# Altium PCB Underwater_vehicle.PcbDoc
Units mil, origin at the board's own origin, x right, y up, seen from the top; angles counter-clockwise.
Board outline 2755.91 x 1968.5 mil, 2 copper layers (Top Layer, Bottom Layer); 64 components, 132 nets, 425 pads, 45 vias.
Unrouted connection lines stored in the file: 127.
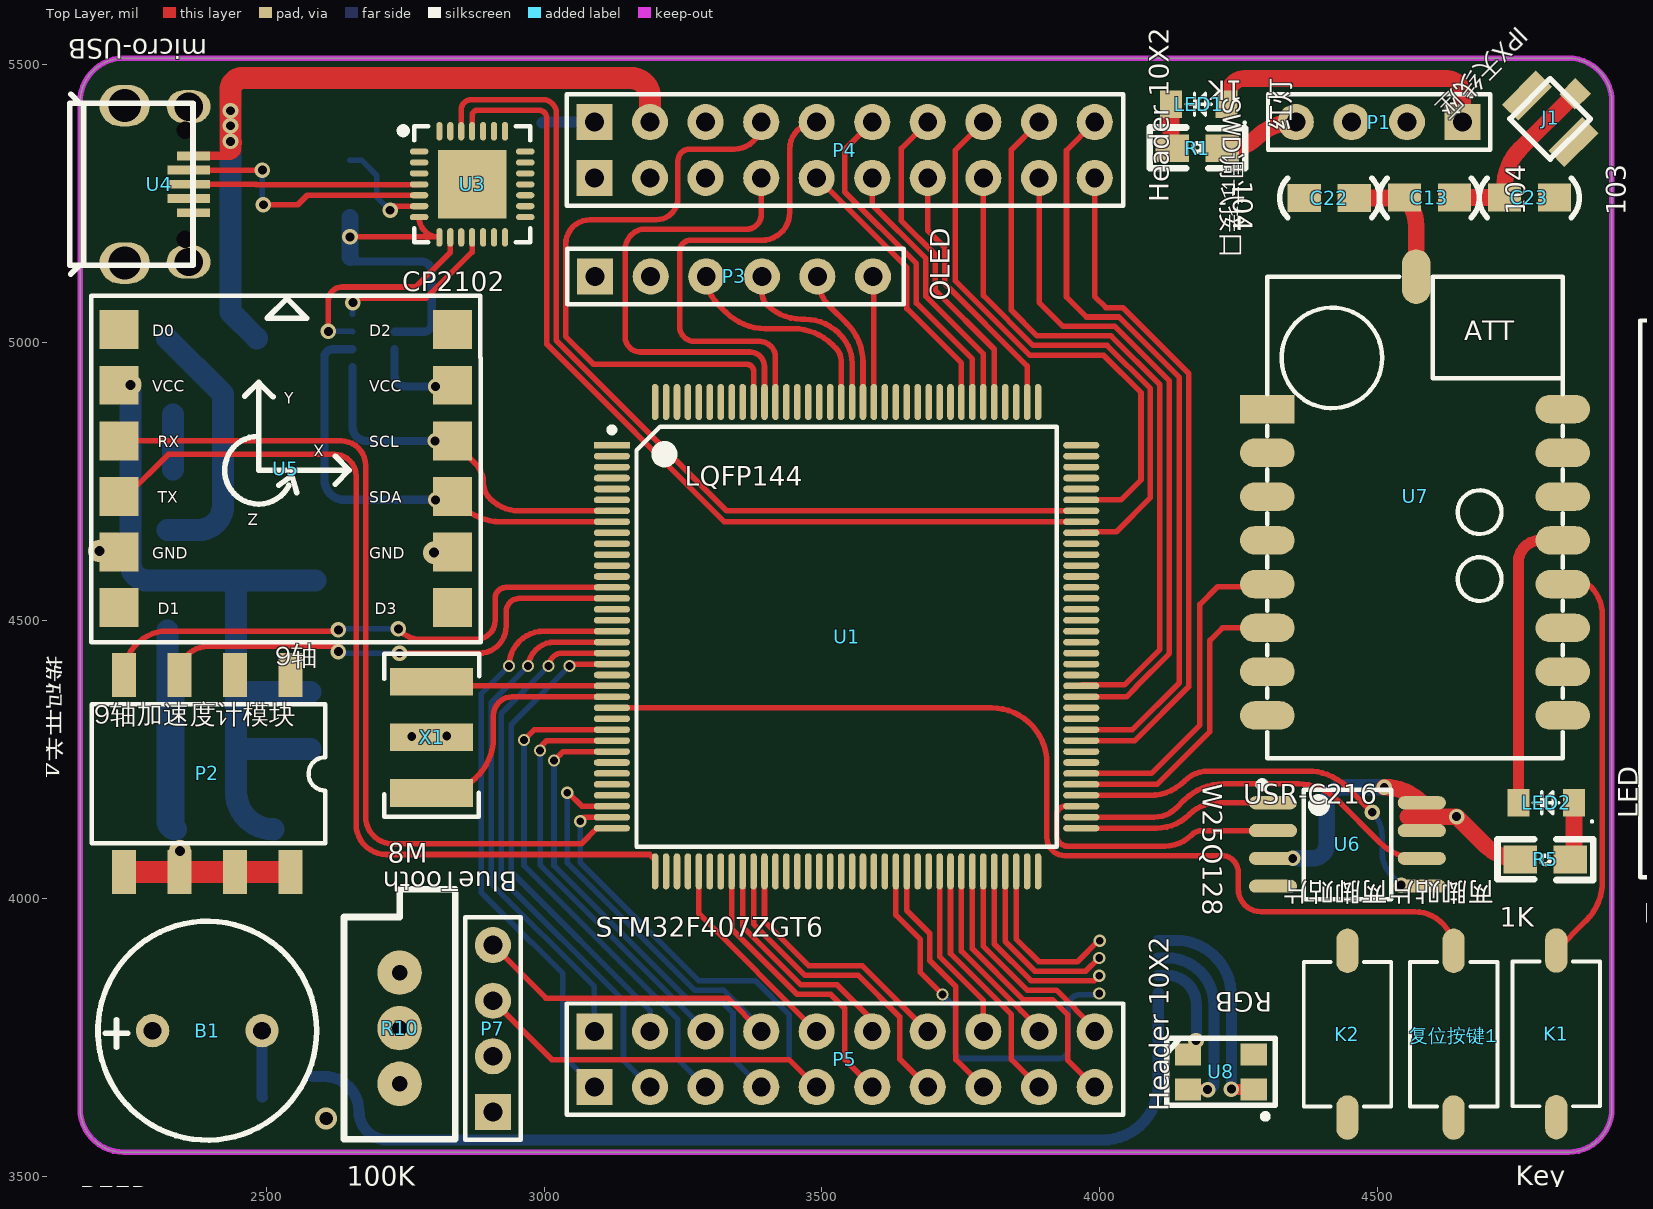
[diagram p0: Top Layer view]
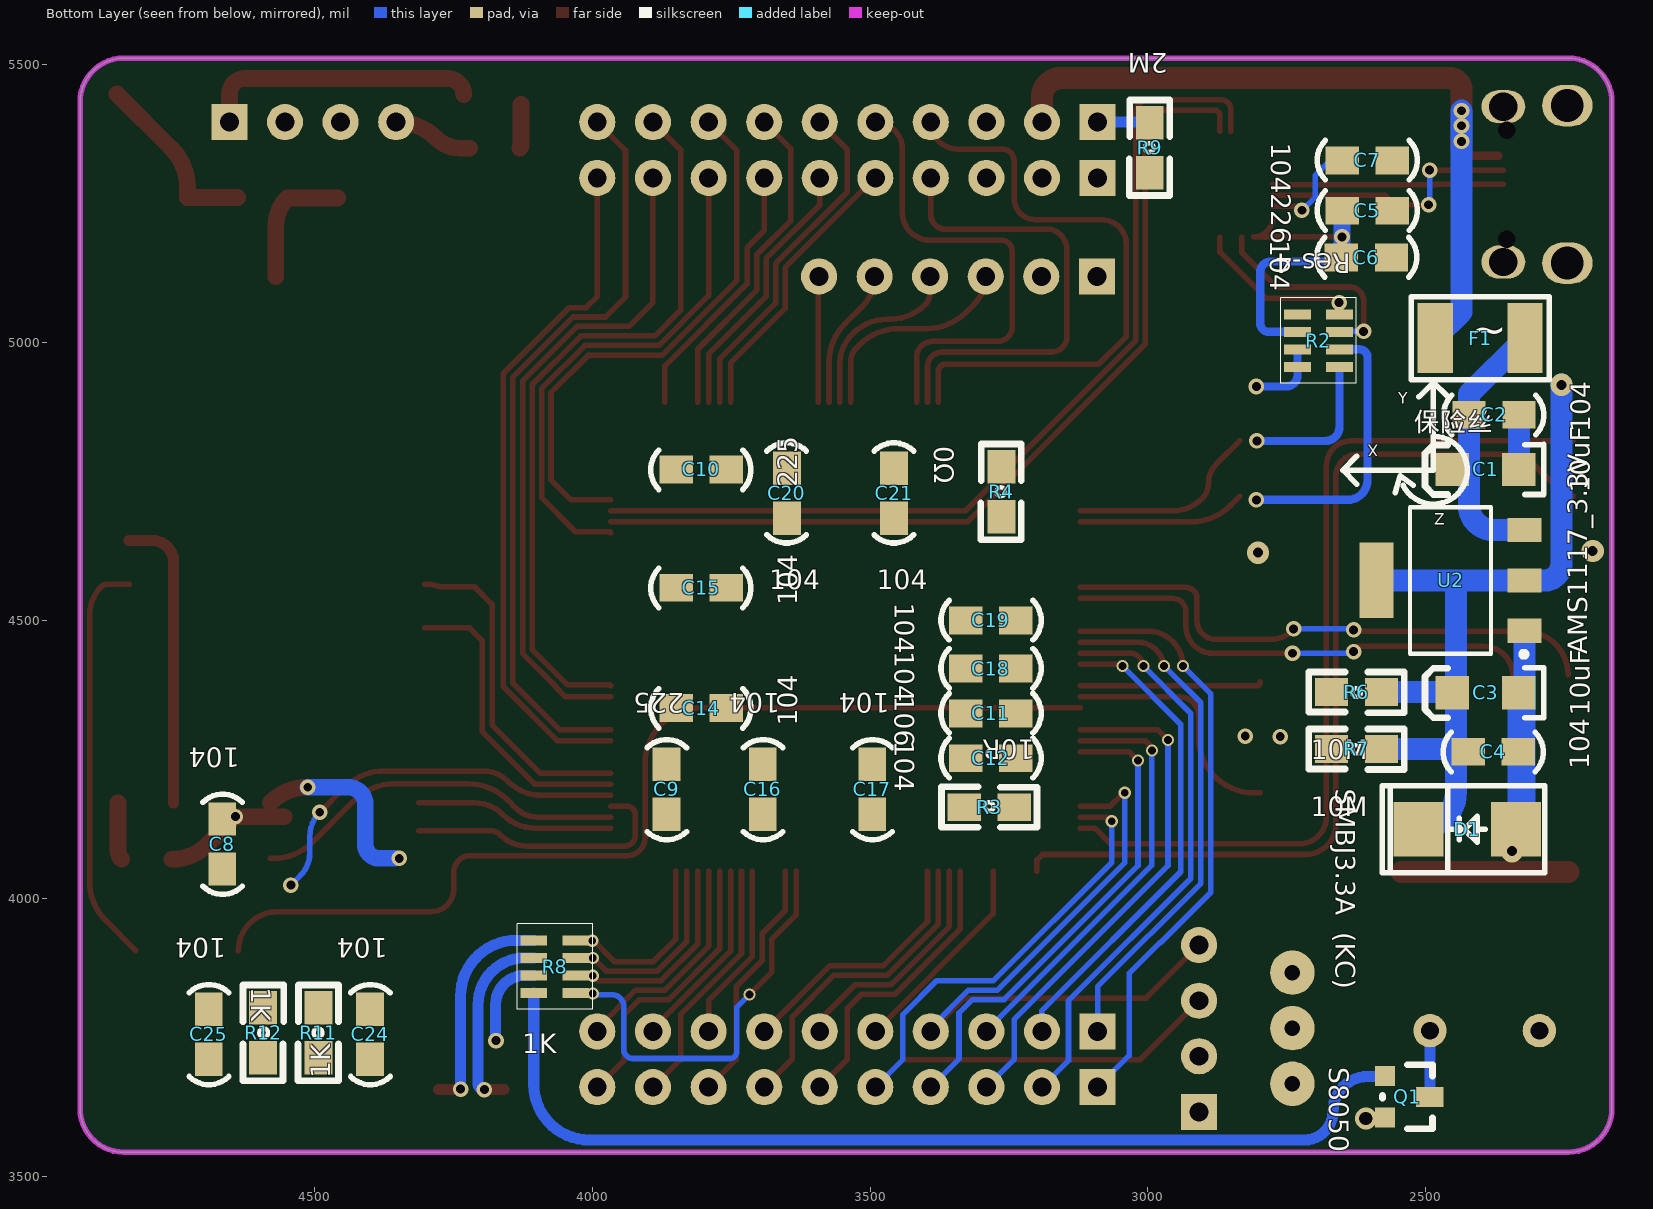
[diagram p1: Bottom Layer view, seen from below]

## Layer stack, top to bottom
Top Solder: solder mask 0.4, Solder Resist, Dk 3.5
Top Layer: signal copper 1.4
Dielectric 1: dielectric 12.6, FR-4, Dk 4.8
Bottom Layer: signal copper 1.4
Bottom Solder: solder mask 0.4, Solder Resist, Dk 3.5

## Board outline
2244.09,3543.31 cw(c2244.09,3622.05) 2165.35,3622.05 2165.35,5433.07 cw(c2244.09,5433.07) 2244.09,5511.81 4842.52,5511.81 cw(c4842.52,5433.07) 4921.26,5433.07 4921.26,3622.05 cw(c4842.52,3622.05) 4842.52,3543.31

## Design rules (kind name [scope] priority, off if disabled: settings)
Clearance Clearance_2 [All] p1: gap=7
ComponentClearance [All] p1: gap=0 collisioncheckmode=3 verticalgap=0 showdistances=FALSE
DiffPairsRouting [All] p1 off: maxlimit=10 minlimit=10 mostfreqgap=10 toplayer_minwidth=15 toplayer_maxwidth=15 toplayer_prefwidth=10 bottomlayer_minwidth=15 bottomlayer_maxwidth=15 bottomlayer_prefwidth=10 maxuncoupledlength=20
PolygonConnect [All] p1: connectstyle=Relief reliefconductorwidth=10 reliefentries=4 polygonreliefangle="90 Angle" airgapwidth=10
RoutingVias [All] p1: holewidth=28 width=50 viastyle="Through Hole" minholewidth=28 minwidth=50 maxholewidth=28 maxwidth=50
SolderMaskExpansion [All] p1: expansion=4
Width [All] p1: maxlimit=300 minlimit=10 preferedwidth=30
28 further rules are at their usual default settings.

## Components (designator, comment, footprint, x,y, rotation, side; value= is the part's Value field where it differs from the comment)
B1 "BEEP" BUZZER 2394.3,3762 r0 top
C1 "10uF" TAJ-A 2452.76,4771.65 r0 bottom
C2 "104" 0805C 2337.45,4870.08 r0 bottom
C3 "10uF" TAJ-A 2452.76,4370.08 r0 bottom
C4 "104" 0805C 2338.58,4263.78 r0 bottom
C5 "226" 0805C 2645.8,5237.22 r180 bottom
C6 "104" 0805C 2647,5153 r180 bottom
C7 "104" 0805C 2645.8,5327.77 r180 bottom
C8 "104" 0805C 4665.35,4137.8 r270 bottom
C9 "225" 0805C 3866.14,4236.22 r270 bottom
C10 "225" 0805C 3763.9,4771.65 r0 bottom
C11 "106" 0805C 3322.83,4332.68 r180 bottom
C12 "104" 0805C 3322.83,4251.97 r180 bottom
C13 "104" 0805C 4632.99,5260.84 r180 top
C14 "104" 0805C 3763.9,4342.52 r0 bottom
C15 "104" 0805C 3763.9,4559.06 r0 bottom
C16 "104" 0805C 3692.91,4236.22 r270 bottom
C17 "104" 0805C 3496.06,4236.22 r270 bottom
C18 "104" 0805C 3322.83,4413.39 r180 bottom
C19 "104" 0805C 3322.83,4500 r180 bottom
C20 "104" 0805C 3649.61,4688.98 r90 bottom
C21 "104" 0805C 3456.69,4688.98 r90 bottom
C22 "104" 0805C 4373,5260 r0 top
C23 "103" 0805C 4813,5261 r180 top
C24 "104" 0805C 4399.54,3795.46 r270 bottom
C25 "104" 0805C 4689.94,3795.46 r270 bottom
C26 "104" 0805C 5127,5161 r180 bottom
D1 "SMBJ3.3A  (KC)" SMBJ 2338.58,4125.98 r270 bottom
F1 "保险丝" 1812 2488.19,5007.87 r180 bottom
J1 "IPX天线座" IPX天线底座 4858.3,5448 r225 top
K1 "Key" 贴片按键 4824,3612 r90 top
K2 "两脚贴片" 贴片按键 4442.7,3900 r270 top
LED1 "红灯" 0805LED(RED) 4225,5424 r180 top
LED2 "LED" 0805LED(GREEN) 4851,4170 r180 top
P1 "SWD调试接口" "Header 4" 4653.54,5397.64 r270 top
P2 "拨码开关4" 拨码开关(4位贴片) 2539.3,4398 r270 top
P3 "OLED" "Header 6" 3091,5118 r90 top
P4 "Header 10X2" "Header 10X2" 3090.55,5297.19 r90 top
P5 "Header 10X2" "Header 10X2" 3090.55,3661.42 r90 top
P6 "Header 10X2" "Header 10X2" 5023,4990 r0 top
P7 "BlueTooth" "Header 4" 2909,3615 r180 top
Q1 "S8050" SOT-23 2568,3678 r270 bottom
R1 "1K" 0805R 4216,5351 r180 top
R2 "Res-4" 排阻(4位贴片) 2657.48,4956.69 r0 bottom
R3 "10R" 0805R 3245.04,4165.35 r0 bottom
R4 "0Ω" 0805R 3265,4772 r270 bottom
R5 "1K" 0805R 4761,4069 r0 top
R6 "10M" 0805R 2665.35,4370.08 r180 bottom
R7 "10M" 0805R 2665.35,4267.72 r180 bottom
R8 "1K" 排阻(4位贴片) 4103,3924 r180 bottom
R9 "2M" 0805R 2998,5391 r270 bottom
R10 "100K" 3296w 2740.16,3666.48 r90 top
R11 "1K" 0805R 4493.55,3798.65 r270 bottom
R12 "1K" 0805R 4590.94,3717.67 r90 bottom
U1 "STM32F407ZGT6" LQFP-144 3208.66,4811.02 r0 top locked
U2 "AMS1117_3.3V" SOT-223 2321.69,4485.14 r90 bottom
U3 "CP2102" QFN-28 2795.59,5360.2 r0 top
U4 "micro-USB" Micro-USB(牛角) 2362.2,5425.2 r270 top
U5 "9轴加速度计模块" 9轴加速度计 2229.3,5031 r0 top locked
U6 "W25Q128" SOW-8 4393.3,4168.38 r0 top
U7 "USR-C216" USR-C216 4417.3,4971.88 r0 top locked
U8 "RGB" RGB-3528 4275.59,3657.48 r180 top
X1 "8M" 三脚贴片8M晶振 2795.3,4390 r0 top
复位按键1 "两脚贴片" 贴片按键 4633.7,3900 r270 top

## Footprints (in the part's own frame and the unit in brackets; to place one, negate y for a bottom-side part, rotate by r counter-clockwise, add the part's x,y. Pads: shape width x height; smd on the part's side, far side on the other; paste and mask are expansions set on the pad)
9轴加速度计 [mil]
  rect 70x70 smd: 1(5.91,-7.81) 2(5.91,-107.81) 3(5.91,-207.81) 4(5.91,-307.81) 5(5.91,-407.81) 6(5.91,-507.81) 7(605.91,-507.81) 8(605.91,-407.81) 9(605.91,-307.81) 10(605.91,-207.81) 11(605.91,-107.81) 12(605.91,-7.81)
  silkscreen extent -44,-570 657,53, body extent -10,-566 622,59, height 87
0805C [mil]
  rect 60x50 smd: 1(-5,0) 2(85,0)
  silkscreen extent -50,-35 131,36, body extent -16,-26 102,29, height 37
0805LED(GREEN) [mil]
  rect 40x50 smd: 1(-2,-2) 2(98,-2)
  silkscreen extent -36,-22 71,33, body extent 7,-27 87,23, height 43
0805LED(RED) [mil]
  rect 40x50 smd: 1(-2.98,-4.95) 2(97.02,-4.95)
  silkscreen extent -37,-25 70,31, body extent 13,-25 80,11, height 35
0805R [mil]
  rect 60x50 smd: 1(-4.51,1.2) 2(85.49,1.2)
  silkscreen extent -46,-36 126,37, body extent -1,-23 78,26, height 18
1812 [mm]
  rect 1.6x3.2 smd: 1(0.127,0) 2(4.227,0)
  silkscreen extent -0.97,-1.9 5.33,1.9, body extent -0.07,-1.6 4.43,1.6, height 1.6
3296w [mil]
  round 80 hole 28: 1(0,0) 2(100,0) 3(200,0)
  silkscreen extent -100,-100 350,100, body extent -88,-96 288,94, height 375
BUZZER [mil]
  round 60 hole 32 mask+0: 1(-98.43,0) 2(98.43,0)
  silkscreen extent -197,-197 197,197, body extent -240,-236 233,236, height 354
"Header 4" [mil]
  rect 65x65 hole 34: 1(0.95,-0.93)
  round 65 hole 34: 2(0.95,-100.93) 3(0.95,-200.93) 4(0.95,-300.93)
  silkscreen extent -49,-351 51,49, body extent -51,-354 49,46, height 336
"Header 6" [mil]
  rect 65x65 hole 34: 1(0.95,-0.93)
  round 65 hole 34: 2(0.95,-100.93) 3(0.95,-200.93) 4(0.95,-300.93) 5(0.95,-400.73) 6(0.95,-500.73)
  silkscreen extent -49,-556 51,49, body extent -48,-555 52,45, height 336
"Header 10X2" [mil]
  rect 65x65 hole 34: 1(-0.98,-0.2) 20(99.41,-0.2)
  round 65 hole 34: 2(-0.98,-100.2) 3(-0.98,-200.2) 4(-0.98,-300.2) 5(-0.98,-400) 6(-0.98,-500) 8(-0.98,-699.8) 10(-0.98,-900.2) 11(99.41,-900.2) 13(99.41,-699.8) 15(99.41,-500) 16(99.41,-400) 17(99.41,-300.2) 18(99.41,-200.2) 19(99.41,-100.2)
  round 65 hole 34 paste+0: 7(-0.98,-599.8) 9(-0.98,-800.2) 12(99.41,-800.2) 14(99.41,-599.8)
  silkscreen extent -51,-952 149,50, body extent -51,-950 149,50, height 114
IPX天线底座 [mm]
  rect 1.05x1 smd: 1(0.073,-0.048)
  rect 2.2x1.05 smd: 2(1.681,1.452) 3(1.681,-1.548)
  silkscreen extent 0.38,-1.35 2.98,1.25, body extent 0.15,-1.57 3,1.43, height 1.3
LQFP-144 [mm]
  rect 1.651x0.3 smd: 1(-2.199,0.11)
  oval 1.651x0.3 smd: 2(-2.199,-0.39) 3(-2.199,-0.89) 4(-2.199,-1.39) 5(-2.199,-1.89) 6(-2.199,-2.39) 7(-2.199,-2.89) 8(-2.199,-3.39) 9(-2.199,-3.89) 10(-2.199,-4.39) 11(-2.199,-4.89) 12(-2.199,-5.39) 13(-2.199,-5.89) 14(-2.199,-6.39) 15(-2.199,-6.89) 16(-2.199,-7.39) 17(-2.199,-7.89) 18(-2.199,-8.39) 19(-2.199,-8.89) 20(-2.199,-9.39) 21(-2.199,-9.89) 22(-2.199,-10.39) 23(-2.199,-10.89) 24(-2.199,-11.39) 25(-2.199,-11.89) 26(-2.199,-12.39) 27(-2.199,-12.89) 28(-2.199,-13.39) 29(-2.199,-13.89) 30(-2.199,-14.39) 31(-2.199,-14.89) 32(-2.199,-15.39) 33(-2.199,-15.89) 34(-2.199,-16.39) 35(-2.199,-16.89) 36(-2.199,-17.39) 73(19.251,-17.39) 74(19.251,-16.89) 75(19.251,-16.39) 76(19.251,-15.89) 77(19.251,-15.39) 78(19.251,-14.89) 79(19.251,-14.39) 80(19.251,-13.89) 81(19.251,-13.39) 82(19.251,-12.89) 83(19.251,-12.39) 84(19.251,-11.89) 85(19.251,-11.39) 86(19.251,-10.89) 87(19.251,-10.39) 88(19.251,-9.89) 89(19.251,-9.39) 90(19.251,-8.89) 91(19.251,-8.39) 92(19.251,-7.89) 93(19.251,-7.39) 94(19.251,-6.89) 95(19.251,-6.39) 96(19.251,-5.89) 97(19.251,-5.39) 98(19.251,-4.89) 99(19.251,-4.39) 100(19.251,-3.89) 101(19.251,-3.39) 102(19.251,-2.89) 103(19.251,-2.39) 104(19.251,-1.89) 105(19.251,-1.39) 106(19.251,-0.89) 107(19.251,-0.39) 108(19.251,0.11)
  oval 0.3x1.651 smd: 37(-0.224,-19.365) 38(0.276,-19.365) 39(0.776,-19.365) 40(1.276,-19.365) 41(1.776,-19.365) 42(2.276,-19.365) 43(2.776,-19.365) 44(3.276,-19.365) 45(3.776,-19.365) 46(4.276,-19.365) 47(4.776,-19.365) 48(5.276,-19.365) 49(5.776,-19.365) 50(6.276,-19.365) 51(6.776,-19.365) 52(7.276,-19.365) 53(7.776,-19.365) 54(8.276,-19.365) 55(8.776,-19.365) 56(9.276,-19.365) 57(9.776,-19.365) 58(10.276,-19.365) 59(10.776,-19.365) 60(11.276,-19.365) 61(11.776,-19.365) 62(12.276,-19.365) 63(12.776,-19.365) 64(13.276,-19.365) 65(13.776,-19.365) 66(14.276,-19.365) 67(14.776,-19.365) 68(15.276,-19.365) 69(15.776,-19.365) 70(16.276,-19.365) 71(16.776,-19.365) 72(17.276,-19.365) 109(17.276,2.085) 110(16.776,2.085) 111(16.276,2.085) 112(15.776,2.085) 113(15.276,2.085) 114(14.776,2.085) 115(14.276,2.085) 116(13.776,2.085) 117(13.276,2.085) 118(12.776,2.085) 119(12.276,2.085) 120(11.776,2.085) 121(11.276,2.085) 122(10.776,2.085) 123(10.276,2.085) 124(9.776,2.085) 125(9.276,2.085) 126(8.776,2.085) 127(8.276,2.085) 128(7.776,2.085) 129(7.276,2.085) 130(6.776,2.085) 131(6.276,2.085) 132(5.776,2.085) 133(5.276,2.085) 134(4.776,2.085) 135(4.276,2.085) 136(3.776,2.085) 137(3.276,2.085) 138(2.776,2.085) 139(2.276,2.085) 140(1.776,2.085) 141(1.276,2.085) 142(0.776,2.085) 143(0.276,2.085) 144(-0.224,2.085)
  silkscreen extent -2.32,-18.24 18.13,0.96, body extent -2.47,-19.64 19.53,2.36, height 1.6
Micro-USB(牛角) [mm]
  round 0.7 hole 0.8: 0(1.1,-0.2) 0(6.075,-0.2)
  rect 0.4x1.5 smd: 1(2.269,0.184) 5(4.869,0.184)
  rect 0.4x1.95 smd: 2(2.919,-0.04) 3(3.569,-0.04) 4(4.219,-0.04)
  oval 1.5x2 hole 1.3: 6(7.119,-0.04) 7(0.019,-0.04)
  oval 1.9x2.3 hole 1.5: 8(-0.031,-2.961) 9(7.169,-2.961)
  silkscreen extent -0.55,-5.47 7.68,0.16, body extent -0.5,-5.51 7.7,-0.08, height 0.23
QFN-28 [mm] "CP2102  USB转串口芯片"
  rect 3.13x3.13 smd mask+0.051: 0(1.909,-1.918)
  oval 0.85x0.28 smd mask+0.051: 1(-0.516,-0.418) 2(-0.516,-0.918) 3(-0.516,-1.418) 4(-0.516,-1.918) 5(-0.516,-2.418) 6(-0.516,-2.918) 7(-0.516,-3.418) 15(4.334,-3.418) 16(4.334,-2.918) 17(4.334,-2.418) 18(4.334,-1.918) 19(4.334,-1.418) 20(4.334,-0.918) 21(4.334,-0.418)
  oval 0.28x0.85 smd mask+0.051: 8(0.409,-4.343) 9(0.909,-4.343) 10(1.409,-4.343) 11(1.909,-4.343) 12(2.409,-4.343) 13(2.909,-4.343) 14(3.409,-4.343) 22(3.409,0.507) 23(2.909,0.507) 24(2.409,0.507) 25(1.909,0.507) 26(1.409,0.507) 27(0.909,0.507) 28(0.409,0.507)
  silkscreen extent -1.39,-4.57 4.56,0.73, body extent -0.58,-4.42 4.42,0.58, height 1
RGB-3528 [mm]
  rect 1.2x1 smd: 1(-0.029,0.03) 2(-0.029,-1.57) 3(2.971,0.03) 4(2.971,-1.57)
  silkscreen extent -1.01,-2.3 3.95,1.38, body extent -0.32,-2.2 3.18,0.6, height 1.9
SMBJ [mil] "TVS瞬态抑制二极管"
  rect 98x90 smd: 1(1.65,0.6) 2(1.65,-174.4)
  silkscreen extent -77,-240 80,52, body extent -50,-196 55,5, height 83
SOT-23 [mil]
  rect 36x36 smd: 1(-2.52,-5.16) 2(72.48,-5.16)
  rect 36x50 smd: 3(35.48,74.84)
  silkscreen extent -23,-10 92,80, body extent -22,-18 92,92, height 47
SOT-223 [mm]
  rect 1.1x1.55 smd: 1(-0.09,0.029) 2(2.21,0.029) 3(4.51,0.029)
  rect 3.45x1.55 smd: 4(2.21,6.779)
  silkscreen extent -1.29,-0.07 5.56,5.25, body extent -1.09,-0.53 5.51,6.83, height 0.8
SOW-8 [mm]
  oval 2.2x0.6 smd: 1(-2.078,0.092) 2(-2.078,-1.178) 3(-2.078,-2.448) 4(-2.078,-3.718) 5(4.722,-3.718) 6(4.722,-2.448) 7(4.722,-1.178) 8(4.722,0.092)
  silkscreen extent -2.73,-4.31 3.32,1.07, body extent -1.72,-4.35 4.32,0.67, height 1.6
TAJ-A [mil]
  rect 60x60 smd: 1(0,0) 2(-120,0)
  silkscreen extent -165,-45 49,45, body extent -125,-31 9,32, height 65
USR-C216 [mm] "有人公司WIFI模组 USR-C216"
  rect 2.5x1.3 smd: 1(-2.945,-2.325)
  oval 2.5x1.3 smd: 2(-2.945,-4.325) 3(-2.945,-6.325) 4(-2.945,-8.325) 5(-2.945,-10.325) 6(-2.945,-12.325) 7(-2.945,-14.325) 8(-2.945,-16.325) 9(10.555,-16.325) 10(10.555,-14.325) 11(10.555,-12.325) 12(10.555,-10.325) 13(10.555,-8.325) 14(10.555,-6.325) 15(10.555,-4.325) 16(10.555,-2.325)
  oval 1.3x2.5 smd: 17(3.855,3.725)
  Top Layer pour cut-out: 4.611,3.725 4.611,-0.905 10.555,-0.905 10.555,3.725
  Top Layer pour cut-out: 0.015,2.305 0.891,2.131 1.634,1.634 2.131,0.891 2.305,0.015 2.305,0.015 2.13,-0.865 1.631,-1.611 0.885,-2.11 0.005,-2.285 0.005,-2.285 -0.015,-2.285 -0.891,-2.111 -1.634,-1.614 -2.131,-0.871 -2.305,0.005 -2.305,0.005 -2.305,0.025 -2.131,0.898 -1.637,1.637 -0.898,2.131 -0.025,2.305 -0.025,2.305
  Top Layer pour cut-out: 6.755,-6.035 7.138,-6.111 7.462,-6.328 7.679,-6.652 7.755,-7.035 7.755,-7.035 7.679,-7.418 7.462,-7.742 7.138,-7.959 6.755,-8.035 6.755,-8.035 6.372,-7.959 6.048,-7.742 5.831,-7.418 5.755,-7.035 5.755,-7.035 5.755,-7.025 5.83,-6.646 6.045,-6.325 6.366,-6.11 6.745,-6.035 6.745,-6.035
  Top Layer pour cut-out: 6.755,-9.085 7.138,-9.161 7.462,-9.378 7.679,-9.702 7.755,-10.085 7.755,-10.085 7.755,-10.105 7.679,-10.488 7.462,-10.812 7.138,-11.029 6.755,-11.105 6.755,-11.105 6.372,-11.029 6.048,-10.812 5.831,-10.488 5.755,-10.105 5.755,-10.105 5.755,-10.085 5.831,-9.702 6.048,-9.378 6.372,-9.161 6.755,-9.085
  silkscreen extent -2.94,-18.28 10.56,3.72, body extent -3.04,-18.19 10.53,3.72, height 1
三脚贴片8M晶振 [mm] "CSTCC8M00G53-RO"
  rect 3.8x1.27 smd: 1(0.06,-0.006) 2(0.06,-5.086) 3(0.06,-2.546)
  silkscreen extent -2.1,-6.18 2.24,1.26, body extent -1.72,-6.23 1.84,1.26, height 1.5
拨码开关(4位贴片) [mm]
  rect 2x1.1 smd: 1(-0.103,0.121) 2(-0.103,-2.419) 3(-0.103,-4.959) 4(-0.103,-7.499) 5(8.897,-7.499) 6(8.897,-4.959) 7(8.897,-2.419) 8(8.897,0.121)
  silkscreen extent 1.24,-8.97 7.59,1.7, body extent 0.99,-8.71 7.85,1.57, height 2.15
排阻(4位贴片) [mm]
  rect 1.22x0.45 smd: 1(-0.051,0.013) 2(1.869,0.013) 3(-0.051,-0.787) 4(1.869,-0.787) 5(-0.051,-1.587) 6(1.869,-1.587) 7(-0.051,-2.387) 8(1.869,-2.387)
  silkscreen extent -0.81,-3.14 2.64,0.76, body extent 0.1,-2.79 1.7,0.41, height 0.59
贴片按键 [mil]
  oval 80x40 smd: 1(-5.71,2.8) 2(294.29,2.8)
  silkscreen extent 14,-76 274,82, body extent 24,-69 264,77, height 98

## Part data
C1 C3: library part "Pol Cap", "极性贴片电容"
C2 C4 C5 C6 C7 C8 C13 C22 C23 C26: library part Cap1, "无极贴片电容"
C9 C10 C11 C12 C14 C15 C16 C17 C18 C19 C20 C21 C24 C25: library part C1
D1: library part Diode, "二极管"
F1: library part Fuse
K1: library part 轻触按键, "轻触开关"
K2 复位按键1: library part Key(两脚贴片)
LED1: library part LED, "发光二极管"
LED2: "发光二极管"
P1 P7: library part "Header 4", "排针"
P2: "4位拨码开关"
P3: library part "Header 6"
Q1: library part NPN, "NPN三极管"
R1 R3 R4 R6 R7 R9: library part R1
R2: "排阻"
R5 R11 R12: library part Res, "电阻"
R8: library part Res-4, "排阻"
R10: library part RPot, "电位器"
U1: library part STM32F407ZET6
U2: library part AMS1117-3.3V/5.0V, "电源芯片"
U3: "USB转串口芯片"
U4: "USB接口"
U5: library part 9轴加速度计
U6: "FLASHоƬ"
X1: library part XTAL三脚贴片晶振

## Via types
v1: diameter 28, hole 16, Top Layer to Bottom Layer, 26 vias
v2: diameter 22, hole 14, Top Layer to Bottom Layer, 14 vias
v3: diameter 40, hole 18, Top Layer to Bottom Layer, 4 vias
v4: diameter 40, hole 24, Top Layer to Bottom Layer, 1 vias

## Nets (pads, with @x,y where several pads share a name; then routed paths per layer and width w, separated by ;. In a path a pad name is that pad's centre, name@x,y a point inside that pad or via, vN(x,y) a via of type N, cw(c..) or ccw(c..) an arc to the next point about the centre after c; other vN are vias at no path point)
3.3V: B1.1 C3.1 C4.2 C8.1 C14.2 C15.2 C16.2 C17.2 C18.2 C19.2 C20.2 C21.2 C26.1 D1.2 LED1.1 P1.1 P3.2 P6.20 R2.2 R2.4 R3.2 R4.2 R5.1 R6.2 R7.2 R11.2 R12.1 U1.17 U1.30 U1.39 U1.52 U1.62 U1.72 U1.84 U1.95 U1.108 U1.121 U1.131 U1.144 U2.2 U2.4 U5.2 U5.11 U6.3 U6.7 U6.8 U7.15 U8.2 | length 2636.5
  Top Layer w30: LED1.1@4231,5446 cw(c4260,5446) 4260,5475 4625,5475 cw(c4625,5447.39) 4652.61,5447.39 P1.1 ; v1(4511.6,4200) cw(c4511.6,4104.38) U6.8 ; 4554,4147 v1(4642,4147) 4692.14,4096.86 ccw(c4756.49,4161.2) R5.1
  Bottom Layer w15: R2.4 2731.07,4940.93 ccw(c2751,4940.93) 2751,4921 v1(2805,4921)
  Bottom Layer w30: v1@4355,4072 4383,4072 ccw(c4383,4097) 4408,4097 4408,4169 cw(c4439,4169) 4428.07,4198.01 cw(c4439,4169) 4439,4200 v1(4511.6,4200)
  Bottom Layer w40: 2256,4602.23 ccw(c2286.52,4602.66) 2286.52,4572.14 2446,4572.14 ; 2256,4602.66 v3(2256,4924) ; 2256.01,4638.01 cw(c2322.82,4638.96) 2256,4638.96 ; D1.2 cw(c2512.98,4191.32) 2446,4191.32 C4.2@2446,4262 ; R7.2 2452.92,4268.92 ccw(c2452.92,4262) C4.2@2446,4262 ; R6.2 2453.28,4371.28 ccw(c2453.28,4364) C3.1@2446,4364 ; U2.4 2446,4572.14 ; C4.2@2446,4262 C3.1@2446,4364 ; C3.1@2446,4364 2446,4572.14
  other v1: 4347,4072
5.0V: C1.1 C2.2 C5.1 C6.1 F1.2 P7.1 R2.6 U2.3 U3.7 U3.8 | length 1087.2
  Top Layer w10: v1(2651,5190) U3.8@2810,5190 ; U3.7@2775,5226 ccw(c2811.42,5226) 2804,5190.35 ; 2784.27,5190 ccw(c2791.69,5225.65) 2791.69,5189.24 ccw(c2790.93,5189.24) 2790.93,5190
  Bottom Layer w15: C6.1 ccw(c2659,5153) 2659,5146 2779,5146 cw(c2779,5127) 2798,5127 2798,5034.59 cw(c2782.6,5034.59) 2782.6,5019.19 R2.6
  Bottom Layer w30: C5.1@2650.8,5225.65 2650.8,5154.2 ccw(c2652,5154.2) C6.1
  Bottom Layer w40: F1.2 2422.45,4907.2 C2.2 2422.45,4707 cw(c2378.14,4707) 2378.14,4662.69 U2.3
ADC0: P5.3 U1.27 | length 925.7
  Top Layer w10: v2(2964,4285) 2982.54,4303.54 U1.27
  Bottom Layer w10: v2(2964,4285) 2964,4059 3241,3782 3241,3710.18 P5.3
ADC1: P5.18 U1.28 | length 775
  Top Layer w10: v2(2993,4266) 2989,4266 2988,4267 3004.86,4283.86 U1.28
  Bottom Layer w10: v2(2993,4266) 2993,4060 3290.75,3762.25 P5.18
ADC2: P5.4 U1.29 | length 874.1
  Top Layer w10: 3026.5,4256.5 3034.17,4264.17 U1.29
  Bottom Layer w10: v2(3018,4248) 3018,4059.04 3259.04,3818 3316,3818 3340,3794 3340,3711.18 P5.4
ADC3: P5.6 U1.44 | length 528.1
  Top Layer w10: U1.44 3337.64,3945.36 3455.5,3827.5 3515.5,3827.5 3541,3802 3541,3709.98 P5.6
ADC4: P5.15 U1.45 | length 422.5
  Top Layer w10: U1.45 3357.32,3949.72 3462.54,3844.5 3527.5,3844.5 3590.55,3781.45 P5.15
BEEP(E8): R8.8 U1.59 | length 734.3
  Top Layer w10: U1.59 3632.91,3970.09 3677,3926 3677,3867 v2(3717,3827)
  Bottom Layer w10: v2(3717,3827) 3740,3804 3740,3724 ccw(c3752,3724) 3752,3712 3927,3712 ccw(c3927,3728) 3943,3728 3943,3805 cw(c3965,3805) 3965,3827 3997,3827 v2(3999,3829)
BOMA1: P2.3 U1.15 | length 881.4
  Top Layer w10: P2.3 cw(c2395.43,4402.06) 2395.43,4453.43 2621.57,4453.43 cw(c2621.57,4445) v1@2630,4445 ; v1(2740,4441) 2883,4441 ccw(c2883,4490) 2932,4490 2932,4516 cw(c2955.76,4516) 2955.76,4539.76 U1.15
  Bottom Layer w10: v1(2630,4444) ccw(c2633,4444) 2633,4441 v1(2740,4441)
BOMA2: P2.4 U1.14 | length 1003.6
  Top Layer w10: P2.4 cw(c2323.01,4402.06) 2323.01,4481 2630,4481 ccw(c2630,4483) v1@2632,4483 ; v1(2738,4485) 2742.15,4480.85 ccw(c2778,4516.7) 2778,4466 2878,4466 ccw(c2878,4500) 2912,4500 2912,4540 cw(c2931.45,4540) 2931.45,4559.45 U1.14
  Bottom Layer w10: v1(2630,4483) cw(c2632,4483) 2632,4485 v1(2738,4485)
BOOT0: P2.1 R7.1 U1.138
BOOT1: P2.2 R6.1 U1.48
C10: U1.111
C15: U1.9
CNA1_RX(D0): P4.6 U1.114 | length 485.9
  Top Layer w10: P4.6 3590.55,5247.45 3687,5151 3687,5083 3790.39,4979.61 U1.114
CNA1_TX(D1): P4.15 U1.115 | length 619.2
  Top Layer w10: P4.15 3541,5347.05 3541,5271.04 3670,5142.04 3670,5071 3770.71,4970.29 U1.115
CP2102_RST: R2.5 U3.9 | length 385.2
  Top Layer w10: v1(2612,5020) 2612,5075 cw(c2637,5075) 2637,5100 2769,5100 2831.38,5162.38 U3.9
  Bottom Layer w10: v1(2612,5020) 2654.67,5020 R2.5
CP2102_SUS: R2.7 U3.11 | length 285
  Top Layer w10: 2668,5080 2788,5080 2870.75,5162.75 U3.11
  Bottom Layer w10: R2.7 2655.48,5071.48 v1(2656,5072)
D3: U1.117
D4: U1.118
D5: U1.119
D11: U1.80
D+: U3.4 U4.3 | length 415
  Top Layer w10: U4.3 2482.1,5284.71 2482.52,5284.29 2774.86,5284.29 U3.4
D-: U3.5 U4.2 | length 495
  Top Layer w10: U4.2 v1(2493.29,5310.29) v1@2495.29,5310.29 ; v1@2493,5248 v1(2495,5248) 2557,5248 2574.02,5265.02 U3.5
  Bottom Layer w10: v1(2493.29,5310.29) 2493.29,5249.71 v1(2495,5248) v1@2495,5256
DAC2(A5): P5.16 U1.41 | length 375.6
  Top Layer w10: U1.41 3278.58,3972.8 P5.16
DCMI_CH1: P6.10 U1.141
DCMI_D0(C6): P6.17 U1.96
DCMI_D1(C7): P6.16 U1.97
DCMI_D2(C8): P6.5 U1.98
DCMI_D3(C9): P6.15 U1.99
DCMI_D4(C11): P6.6 U1.112
DCMI_D5(B6): P6.14 U1.136
DCMI_D6(E5): P6.7 U1.4
DCMI_D7(E6): P6.8 U1.5
DCMI_HREF(A4): P6.18 U1.40
DCMI_PCLK(A6): P6.13 U1.42
DCMI_PWDN: P6.9 U1.142
DCMI_RESET: P6.4 U1.1
DCMI_SCL(D6): P6.2 U1.122
DCMI_SDA(D7): P6.19 U1.123
DCMI_VSYNC: P6.3 U1.137
DCMI_XCLK: P6.12 U1.2
E4: U1.3
E7: U1.58
E10: P5.13 U1.63 | length 320.4
  Top Layer w10: U1.63 3711.65,3895.35 3790.35,3816.65 P5.13
E12: P5.12 U1.65 | length 345.7
  Top Layer w10: U1.65 3751.02,3905.02 3858,3798.04 ; 3858,3798 3890.75,3765.25 P5.12
F0: U1.10
F1: U1.11
F2: U1.12
F3: U1.13
F10: U1.22
F11: U1.49
F12: U1.50
F13: U1.53
F14: U1.54
F15: U1.55
G13: U1.128
G14: U1.129
G15: U1.132
GND: C1.2 C2.1 C3.2 C4.1 C5.2 C6.2 C7.2 C8.2 C9.1 C10.1 C11.1 C12.1 C14.1 C15.1 C16.1 C17.1 C18.1 C19.1 C20.1 C21.1 C22.1 C23.1 C24.2 C25.2 C26.2 D1.1 J1.2 J1.3 K1.1 K2.2 P1.4 P2.5 P2.6 P2.7 P2.8 P3.1 P4.1 P4.2 P4.3 P6.1 P6.11 P7.2 Q1.2 R1.1 R2.8 R10.1 U1.16 U1.31 U1.38 U1.51 U1.61 U1.83 U1.94 U1.107 U1.120 U1.130 U2.1 U3.3 U4.5 U5.5 U5.8 U6.4 U7.16 X1.3 复位按键1.2 | length 1157.7
  Top Layer w30: R1.1 4237.9,5349.8 ccw(c4237.9,5409.89) 4280.4,5367.4 cw(c4351.11,5296.69) 4351.11,5396.69 P1.4
  Top Layer w40: P2.5 P2.6 P2.7 P2.8
  Bottom Layer w40: U2.1 2322.82,4139.5 ccw(c2337.98,4139.5) D1.1 cw(c2337.98,4129.56) 2332.76,4129.56 C3.2 ; C1.2@2332.45,4771.65 C2.1
  other v1: 2762,4291 2825,4292
  other v3: 2345,4085 2802,4622 2200,4625
  other v4: 2608,3604
IIC1_SCL(B8): U1.139
IIC1_SDA(B9): U1.140
IIC_SCL(C13): R2.1 U1.7 U5.10 | length 624.2
  Top Layer w10: U5.10 2877.27,4781.13 cw(c2844.11,4747.97) 2891,4747.97 ccw(c2931.97,4747.97) 2903,4719 ccw(c2955.52,4771.52) 2955.52,4697.24 U1.7
  Bottom Layer w15: R2.1 2655.48,4848.52 ccw(c2681,4848.52) 2681,4823 v1(2804,4823)
IIC_SDA(C14): R2.3 U1.8 U5.9 | length 800.9
  Top Layer w10: U5.9 2851.55,4706.85 ccw(c2922.26,4777.56) 2922.26,4677.56 U1.8
  Bottom Layer w15: R2.3 2619.69,4987.69 ccw(c2619.69,4973) 2605,4973 2605,4753 ccw(c2641,4753) 2641,4717 v1(2805,4717)
KEY0: C24.1 K2.1 R11.1
LEDB(B11): R8.2 U1.70 | length 305
  Top Layer w10: U1.70 3849.45,3926.8 3890.25,3886 3959.47,3886 3997.47,3924 v2(4000,3924)
LEDG(B10): R8.4 U1.69 | length 327.5
  Top Layer w10: U1.69 3829.76,3922.44 3883.21,3869 3974.47,3869 3998.47,3893 v2(3999,3893)
LEDR(E15): R8.6 U1.68 | length 350.6
  Top Layer w10: U1.68 3810.08,3918.09 3876.17,3852 3990,3852 v2(3999,3861)
NetB1_2: B1.2 Q1.3 | length 119.9
  Bottom Layer w20: B1.2 2492.72,3642.52 Q1.3
NetC7_1: C7.1 U3.6 | length 187.2
  Top Layer w10: v1@2720.34,5245.34 U3.6
  Bottom Layer w10: C7.1 2672.23,5327.77 2699,5301 2699,5262 v1(2723,5238)
NetC9_2: C9.2 U1.71
NetC10_2: C10.2 U1.106
NetC13_1: C13.1 C23.2 J1.1 | length 324.6
  Top Layer w30: C13.1 4638.15,5261 C23.2 4728,5278.95 cw(c4828,5278.95) 4757.29,5349.66 J1.1
NetLED1_2: LED1.2 R1.2 | length 79.8
  Top Layer w30: LED1.2 4127.98,5355.9 ccw(c4136.61,5355.9) R1.2
NetLED2_1: LED2.1 R5.2 | length 103.5
  Top Layer w30: R5.2 ccw(c4830.77,4085.93) 4853,4085.93 LED2.1
NetQ1_1: Q1.1 R8.7 | length 1808.2
  Bottom Layer w20: Q1.1@2583.9,3679.69 2604.31,3679.69 cw(c2604.31,3617) 2667,3617 ccw(c2718.69,3617) 2718.69,3565.31 4005,3565.31 ccw(c4005,3665.31) 4105,3665.31 R8.7
NetR4_1: R4.1 U1.143
NetR8_1: R8.1 U8.1 | length 397
  Top Layer w20: v1(4236.72,3657) 4236.72,3656.3 U8.1
  Bottom Layer w20: R8.1 4136.72,3924.5 cw(c4136.72,3824.5) 4236.72,3824.5 v1(4236.72,3657)
NetR8_3: R8.3 U8.3 | length 343.3
  Top Layer w20: U8.3 4194,3656.3 v1(4194,3656)
  Bottom Layer w20: R8.3 4121.24,3893 cw(c4121.24,3809.02) 4205.22,3809.02 4205.22,3667.22 cw(c4194,3667.22) v1(4194,3656)
NetR8_5: R8.5 U8.4 | length 152.4
  Bottom Layer w20: R8.5 4121.24,3861.5 cw(c4121.24,3809.02) 4173.72,3809.02 v1@4173.72,3755.28
  other v1: 4173,3744
OLED_D0(G12): P3.3 U1.127 | length 391.3
  Top Layer w10: P3.3 ccw(c3361.66,5118.95) 3312.35,5069.65 3327.71,5054.29 ccw(c3398.42,5125) 3398.42,5025 3448.58,5025 cw(c3448.58,4925) 3519.29,4995.71 3525.64,4989.36 cw(c3504.28,4968) 3534.49,4968 U1.127
OLED_D1(G11): P3.4 U1.126 | length 326.7
  Top Layer w10: P3.4 3391.93,5089.9 ccw(c3422.9,5089.9) 3401,5068 ccw(c3463.77,5130.77) 3463.77,5042 3469,5042 cw(c3469,4955.09) 3530.46,5016.54 3533,5014 cw(c3481.88,4962.88) 3554.17,4962.88 U1.126
OLED_DC(G9): P3.6 U1.124 | length 226.3
  Top Layer w10: P3.6 cw(c3587.36,5114.58) 3593.54,5114.58 U1.124
OLED_RES(G10): P3.5 U1.125 | length 252.3
  Top Layer w10: P3.5 ccw(c3568.23,5118.95) 3514.14,5064.86 3545,5034 cw(c3475.33,4964.33) 3573.86,4964.33 U1.125
OSCIN: U1.23 X1.1 | length 328.7
  Top Layer w10: X1.1 ccw(c2805.14,4389.76) 2805.14,4382.28 U1.23
OSCOUT: U1.24 X1.2 | length 439.9
  Top Layer w10: X1.2 2809,4189.76 ccw(c2809,4289.76) 2909,4289.76 2909,4329 cw(c2942.6,4329) 2942.6,4362.6 U1.24
POWER_5V_IN: F1.1 P4.18 P4.19 U4.1 | length 1432.5
  Top Layer w15: U4.1 2435.88,5335.88
  Top Layer w40: v1@2436,5349 v1@2436,5360 ; v1@2437,5360 cw(c2437,5361) 2436,5361 2436,5454 cw(c2458,5454) 2458,5476 3156,5476 cw(c3156,5441.25) 3190.75,5441.25 P4.19
  Bottom Layer w40: v1(2436,5417) v1(2436,5390) v1(2436,5362) 2436,5193 2436,5055.06 F1.1
POWER_ADC(C0): R9.2 R10.2 U1.26
POWER_IN: P4.20 R9.1 | length 94.2
  Bottom Layer w20: R9.1 cw(c2999.42,5392.89) 2999.42,5396.6 P4.20
SPI1_CLK(B3): P4.16 U1.133 | length 847.8
  Top Layer w10: U1.133 3416.38,4973.62 ccw(c3388,4973.62) 3388,5002 3271,5002 cw(c3271,5029) 3244,5029 3244,5164 cw(c3264,5164) 3264,5184 3392,5184 ccw(c3392,5234) 3437.99,5214.39 ccw(c3392,5234) 3442,5234 3442,5348.05 cw(c3490.55,5348.05) P4.16
SPI1_MISO(B4): P4.4 U1.134 | length 848.7
  Top Layer w10: P4.4 3390.75,5230 cw(c3364.75,5230) 3364.75,5204 3175.34,5204 ccw(c3184,5167) 3146,5167 3146,5010.49 ccw(c3173.49,5010.49) 3173.49,4983 3370,4983 cw(c3370,4956.31) 3396.69,4956.31 U1.134
SPI1_MOSI(B5): P4.17 U1.135 | length 1093.2
  Top Layer w10: U1.135 3377.01,4948.75 ccw(c3364.76,4948.75) 3364.76,4961 3089.04,4961 3039,5011.04 3039,5177 cw(c3083,5177) 3083,5221 3202,5221 ccw(c3202,5260) 3241,5260 3241,5327 cw(c3262,5327) 3262,5348 3342.15,5348 ccw(c3342.15,5396.6) P4.17
SPI1_NSS(A15): P4.7 U1.110 | length 477.1
  Top Layer w10: P4.7 3690.35,5201.65 3721,5171 3721,5106 3869.13,4957.87 U1.110
SPI2_MISO(B14): U1.75 U6.2 | length 497.9
  Top Layer w10: U1.75 3937.82,4165.75 ccw(c3937.82,4150) 3922.07,4150 3922.07,4113.85 ccw(c3941.92,4113.85) 3941.92,4094 4116.72,4094 ccw(c4116.72,4162.28) 4165,4114 cw(c4184.29,4094.71) 4184.29,4121.99 U6.2
SPI2_MOSI(B15): U1.76 U6.5 | length 708.8
  Top Layer w10: U1.76 4090.28,4185.43 ccw(c4090.28,4272.72) 4152,4211 cw(c4195.46,4167.54) 4195.46,4229 4374.58,4229 cw(c4374.58,4129) 4408.7,4223 cw(c4374.58,4129) 4445.29,4199.71 v1(4490,4155)
  Bottom Layer w10: v1(4490,4155) cw(c4446.54,4111.54) 4508,4111.54 4508,4082 ccw(c4565.94,4082) 4524.97,4041.03 v1(4542,4024)
SPI2_NSS(B12): U1.73 U6.1 | length 357.1
  Top Layer w10: U1.73 4101.56,4126.38 ccw(c4101.56,4210.44) 4161,4151 cw(c4211.68,4100.32) 4211.68,4171.99 U6.1
SPI2_SCK(B13): U1.74 U6.6 | length 677.6
  Top Layer w10: U1.74 4097.11,4146.06 ccw(c4097.11,4203.89) 4138,4163 4151.71,4176.71 cw(c4222.42,4106) 4222.42,4206 4356.58,4206 cw(c4356.58,4106) 4427.29,4176.71 4502.72,4101.28 ccw(c4573.43,4171.99) 4573.43,4071.99 U6.6
STM32_RESET: C25.1 R12.2 U1.25 复位按键1.1 | length 1834.2
  Top Layer w10: U1.25 3804.74,4342.91 cw(c3804.74,4242.91) 3904.74,4242.91 3904.74,4109.26 ccw(c3937,4109.26) 3937,4077 4219,4077 cw(c4219,4047) 4249,4047 4249,4017 ccw(c4290,4017) 4290,3976 4566.2,3976 cw(c4566.2,3905.71) 复位按键1.1
SWCLK(A14): P1.3 U1.109
SWDIO(A13): P1.2 U1.105
TIM1_CH1(A8): P4.8 U1.100 | length 928.2
  Top Layer w10: P4.8 3790.35,5084.73 3880.08,4995 4013.04,4995 4091,4917.04 4091,4721 4029.65,4659.65 3968.35,4659.65 U1.100
TIM1_CH1(E9): P5.8 U1.60 | length 445.2
  Top Layer w10: U1.60 3652.6,3978.4 3694,3937 3694,3888 3741,3841 3741,3709.79 P5.8
TIM1_CH2(E11): P5.9 U1.64 | length 454.2
  Top Layer w10: U1.64 3731.34,3900.66 3841,3791 3841,3710.18 P5.9
TIM1_CH3(E13): P5.10 U1.66 | length 510.3
  Top Layer w10: U1.66 3770.71,3909.37 3862.08,3818 3915,3818 3942,3791 3942,3709.18 P5.10
TIM1_CH4(A11): P4.13 U1.103 | length 1003.1
  Top Layer w10: P4.13 3740,5346.24 3740,5111.04 3874.04,4977 4007,4977 4074,4910 4074,4753 4037.93,4716.93 U1.103
TIM1_CH4(E14): P5.11 U1.67 | length 401.8
  Top Layer w10: U1.67 3790.39,3913.73 3869.12,3835 3922.04,3835 3990.75,3766.29 P5.11
TIM3_CH2(A7): U1.43
TIM3_CH3(B0): P5.7 U1.46 | length 574.2
  Top Layer w10: U1.46 3377.01,3954.08 3469.58,3861.5 3565.5,3861.5 3640,3787 3640,3710.79 P5.7
TIM3_CH4(B1): P5.14 U1.47 | length 465.7
  Top Layer w10: U1.47 3396.69,3958.43 3476.62,3878.5 3572.68,3878.5 P5.14
TIM4_CH1(D12): P4.10 U1.81 | length 1236.7
  Top Layer w10: U1.81 4062.9,4283.86 4160,4380.96 4160,4944.21 4041.21,5063 4011,5063 3990.75,5083.25 P4.10
TIM4_CH2(D13): P4.11 U1.82 | length 1359.2
  Top Layer w10: U1.82 4058.54,4303.54 4143,4388 4143,4937.17 4034.17,5046 3976,5046 3940,5082 3940,5345.85 P4.11
TIM4_CH3(D14): P4.9 U1.85 | length 1198.3
  Top Layer w10: P4.9 3890.75,5072.25 3934,5029 4027.12,5029 4125,4931.12 4125,4440.96 4065.5,4381.46 4065.5,4380.5 4047.6,4362.6 U1.85
TIM4_CH4(D15): P4.12 U1.86 | length 1326.3
  Top Layer w10: P4.12 3841,5346.85 3841,5058.12 3887.12,5012 4020.08,5012 4108,4924.08 4108,4448 4044.06,4384.06 3968.35,4384.06 U1.86
TIM10_CH1(F6): P5.1 U1.18 | length 1084.1
  Top Layer w10: v2(2937,4418) cw(c2999.71,4418) 2999.71,4480.71 U1.18
  Bottom Layer w10: v2(2937,4418) 2887,4368 2887,4011 2978,3920 2979,3920 3034,3865 3034,3717.18 P5.1
TIM11_CH1(F7): P5.20 U1.19 | length 939.9
  Top Layer w10: v2@2971,4413 cw(c3019.02,4413) 3019.02,4461.02 U1.19
  Bottom Layer w10: v2(2971,4418) 2905,4352 2905,4027 3090.75,3841.25 P5.20
TIM13_CH1(F8): P5.2 U1.20 | length 1030.1
  Top Layer w10: v2@3009.18,4417.67 cw(c3032.85,4417.67) 3032.85,4441.34 U1.20
  Bottom Layer w10: v2(3008,4418) 2923,4333 2923,4036 3143,3816 3143,3708.18 P5.2
TIM14_CH1(F9): P5.19 U1.21 | length 882.3
  Top Layer w10: v2(3046,4418) cw(c3049.65,4418) 3049.65,4421.65 U1.21
  Bottom Layer w10: v2(3046,4418) 2941,4313 2941,4048 3190.75,3798.25 P5.19
U1_RX(A10): U1.102 U3.26 | length 1714.4
  Top Layer w10: U3.26 2851.06,5419.06 cw(c2869,5419.06) 2869,5437 2998.12,5437 cw(c2998.12,5413.12) 3022,5413.12 3022,5004 3328.76,4697.24 U1.102
U1_TX(A9): U1.101 U3.25 | length 1677
  Top Layer w10: U3.25 2870.75,5408.75 cw(c2880,5408.75) 2880,5418 2991,5418 cw(c2991,5404) 3005,5404 3005,4996.96 3324.4,4677.56 U1.101
U2_RX(A3): U1.37 U5.4 | length 1700.5
  Top Layer w10: U5.4 2248.19,4723.19 2324,4799 2623,4799 cw(c2623,4760) 2662,4760 2662,4133.49 ccw(c2716.49,4133.49) 2716.49,4079 3190,4079 3199.84,4069.16 U1.37
U2_TX(A2): U1.36 U5.3 | length 1583.7
  Top Layer w10: U5.3 2635,4823.19 cw(c2635,4779.19) 2679,4779.19 2679,4147.41 ccw(c2728.41,4147.41) 2728.41,4098 3067,4098 3095.38,4126.38 U1.36
U3_RX(D9): U1.78 U7.5 | length 601.6
  Top Layer w10: U1.78 4092.8,4224.8 4180,4312 4180,4529 4211.72,4560.72 4274.1,4560.72 cw(c4301.35,4483.38) U7.5
U3_TX(D8): U1.77 U7.6 | length 547.5
  Top Layer w10: U1.77 4103.12,4205.12 4198,4300 4198,4464 4220.65,4486.65 U7.6
U4_RX(A1): P5.5 P7.3 U1.35 | length 1422.1
  Top Layer w10: P7.3 3013.98,3710 3440.98,3710 P5.5 ; v2(3065,4139) 3065,4140 3071.06,4146.06 U1.35
  Bottom Layer w10: v2(3065,4139) 3065,4065.04 3278.04,3852 3380,3852 3441,3791 3441,3709.98 P5.5
U4_TX(A0): P5.17 P7.4 U1.34 | length 1240.2
  Top Layer w10: P7.4 3003.48,3820.5 3331.07,3820.5 P5.17 ; v2@3043,4190 3044,4190 3068.25,4165.75 U1.34
  Bottom Layer w10: v2(3042,4190) 3042,4064 3271,3835 3323.04,3835 3390.75,3767.29 P5.17
U5_RX(D2): P4.5 U1.116 | length 511.7
  Top Layer w10: P4.5 3491.8,5296.2 3653,5135 3653,5061 3751.02,4962.98 U1.116
U5_TX(C12): P4.14 U1.113 | length 592.3
  Top Layer w10: P4.14 3643,5349.24 3643,5219.04 3704,5158.04 3704,5094 3810.08,4987.92 U1.113
VBAT: U1.6
VDDA: C11.2 C12.2 R3.1 U1.32 U1.33
WIFI_ANT: C13.2 C22.2 U7.17 | length 238.2
  Top Layer w30: C22.2 4545.96,5260 ccw(c4545.96,5262.88) C13.2 cw(c4497.1,5209.95) 4569.07,5209.95 U7.17
WIFI_LINKED: LED2.2 U7.13 | length 535.2
  Top Layer w20: LED2.2 4753,4605.01 cw(c4792.11,4605.01) 4792.11,4644.13 U7.13
WIFI_RELOAD: K1.2 U7.12 | length 741.8
  Top Layer w10: K1.2 4874.97,3960.06 ccw(c4804.26,4030.77) 4904.26,4030.77 4904.26,4509.67 ccw(c4831.67,4509.67) 4883,4561 ccw(c4872.41,4550.41) 4872.41,4565.39 U7.12
pads on no net: R10.3 U1.56 U1.57 U1.79 U1.87 U1.88 U1.89 U1.90 U1.91 U1.92 U1.93 U1.104 U3.0 U3.1 U3.2 U3.10 U3.12 U3.13 U3.14 U3.15 U3.16 U3.17 U3.18 U3.19 U3.20 U3.21 U3.22 U3.23 U3.24 U3.27 U3.28 U4.0 U4.4 U4.6 U4.7 U4.8 U4.9 U5.1 U5.6 U5.7 U5.12 U7.1 U7.2 U7.3 U7.4 U7.7 U7.8 U7.9 U7.10 U7.11 U7.14

## Polygon pours and split planes (outlines as drawn)
no net on Bottom Solder (solid): 3716.2,4854.31

## Keep-outs
Keep-Out Layer:
  lines w10: 9962.64,2200.79 10480.31,2200.79 ccw(c10480.31,2259.84) 10539.37,2259.84 10539.37,4874.02 ccw(c10468.5,4874.02) 10468.5,4944.88 9964.57,4944.88 ; 2165.35,3622.05 ccw(c2244.09,3622.05) 2244.09,3543.31 4842.52,3543.31 ccw(c4842.52,3622.05) 4921.26,3622.05 4921.26,5433.07 ccw(c4842.52,5433.07) 4842.52,5511.81 2244.09,5511.81 ccw(c2244.09,5433.07) 2165.35,5433.07 2165.35,3622.05

## Other copper
Top Layer:
  text "集美大学" at 10462.91,4185.69 h200 r90
  text "iROBOT" at 10461.87,2248.73 h130 r90

## Silkscreen, mask and mechanical layers (free items; w line width, h text height)
Top Overlay:
  lines w10: 6876.34,6602.57 6901.34,6627.57 6901.34,6469.57 7064.34,6469.57 ; 6901.34,6530.6 ccw(c6901.34,6469.57) 6955.93,6442.27 ; 6902.34,6626.57 6927.34,6601.57 ; 6937.47,6442.19 6961.34,6459.57 6970.28,6429.02 ; 7039.34,6444.57 7064.34,6469.57 ; 7039.34,6494.57 7064.34,6469.57
  text "Y" at 6947.34,6581.57 h35
  text "X" at 7019.34,6522.57 h35 r180
  text "Z" at 6909.45,6385.83 h35 r180
Top Solder:
  text "集美大学" at 10462.91,4185.69 h200 r90
  text "iROBOT" at 10461.87,2248.73 h130 r90

## Text inside footprints (layer, text, board x,y; h text height)
F1: Bottom Overlay "~" at 2420.19,4976.87 h98.43
U1: Top Overlay "LQFP144" at 3252.95,4730.31 h60
U5: Top Overlay "9轴" at 2516.7,4407.97 h60; Top Overlay "D3" at 2695.2,4504.19 h35; Top Overlay "D2" at 2685.2,5004.19 h35; Top Overlay "D1" at 2305.2,4504.19 h35; Top Overlay "D0" at 2295.2,5004.19 h35; Top Overlay "SCL" at 2685.2,4804.19 h35; Top Overlay "SDA" at 2685.2,4704.19 h35; Top Overlay "TX" at 2305.2,4704.19 h35; Top Overlay "RX" at 2305.2,4804.19 h35; Top Overlay "GND" at 2685.2,4604.19 h35; Top Overlay "GND" at 2295.2,4604.19 h35; Top Overlay "VCC" at 2685.2,4904.19 h35; Top Overlay "VCC" at 2295.2,4904.19 h35; Top Overlay "Z" at 2486.19,4699.31 h35 r180; Top Overlay "X" at 2604.51,4823.46 h35 r180; Top Overlay "Y" at 2532.51,4882.46 h35; Bottom Overlay "Z" at 2485.11,4665.06 h35; Bottom Overlay "X" at 2604.51,4823.46 h35 r180; Bottom Overlay "Y" at 2532.51,4882.46 h35
U7: Top Overlay "ATT" at 4655.85,4992.54 h60